# EAGLE board led-er-v2.2 (EAGLE 7.2.0)
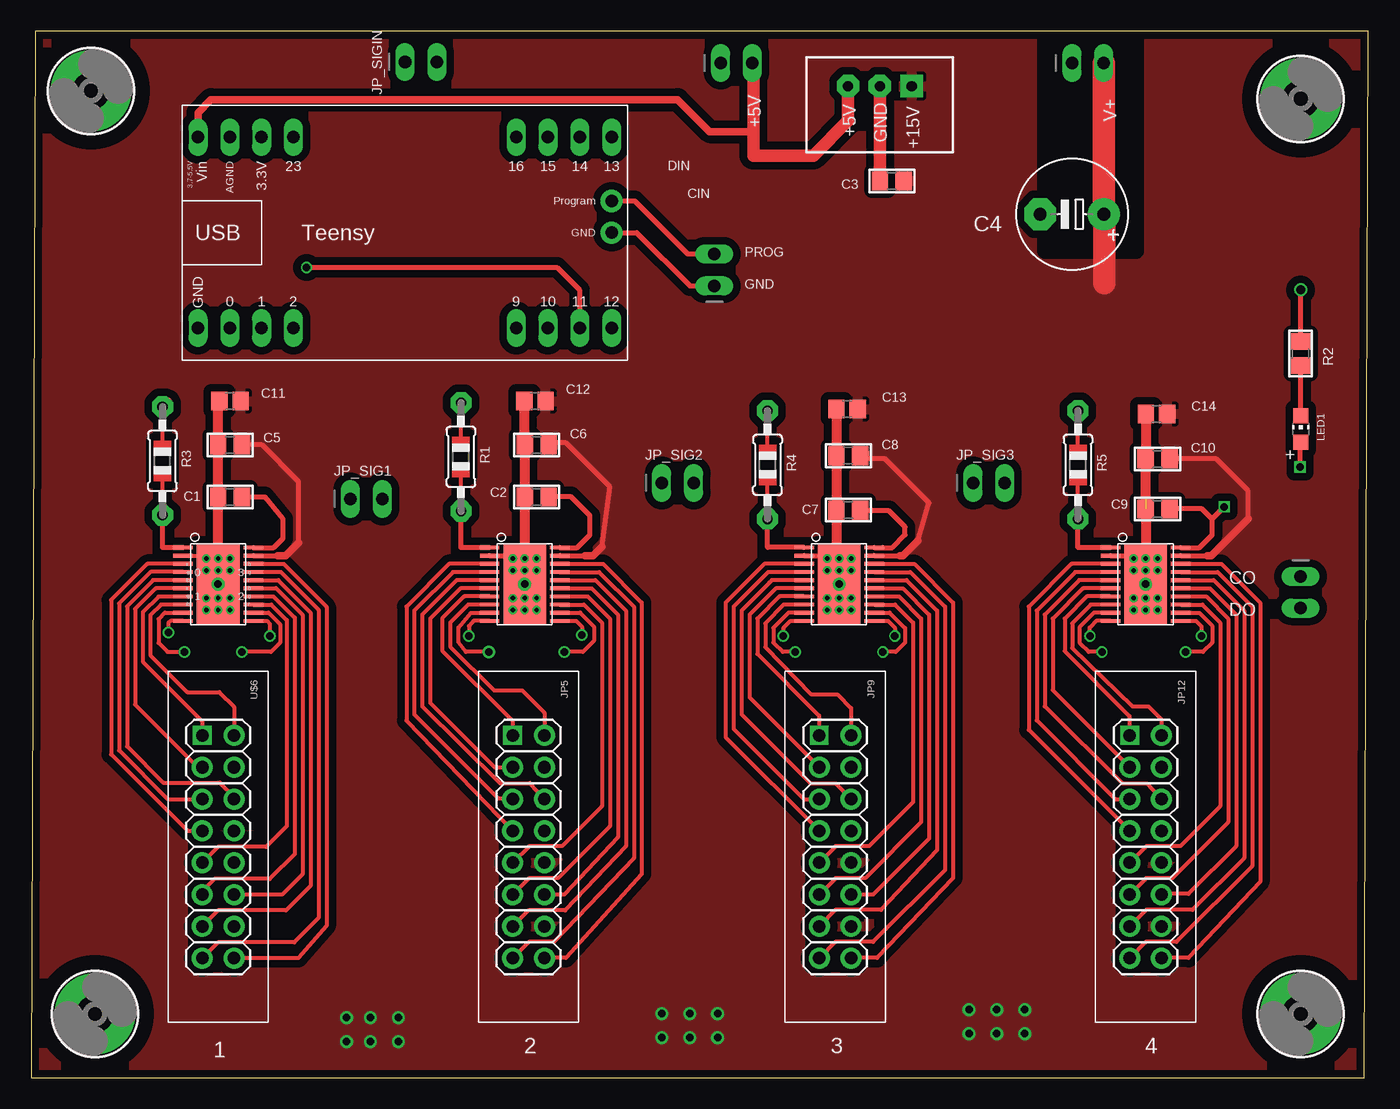
[diagram p0: board, top side]
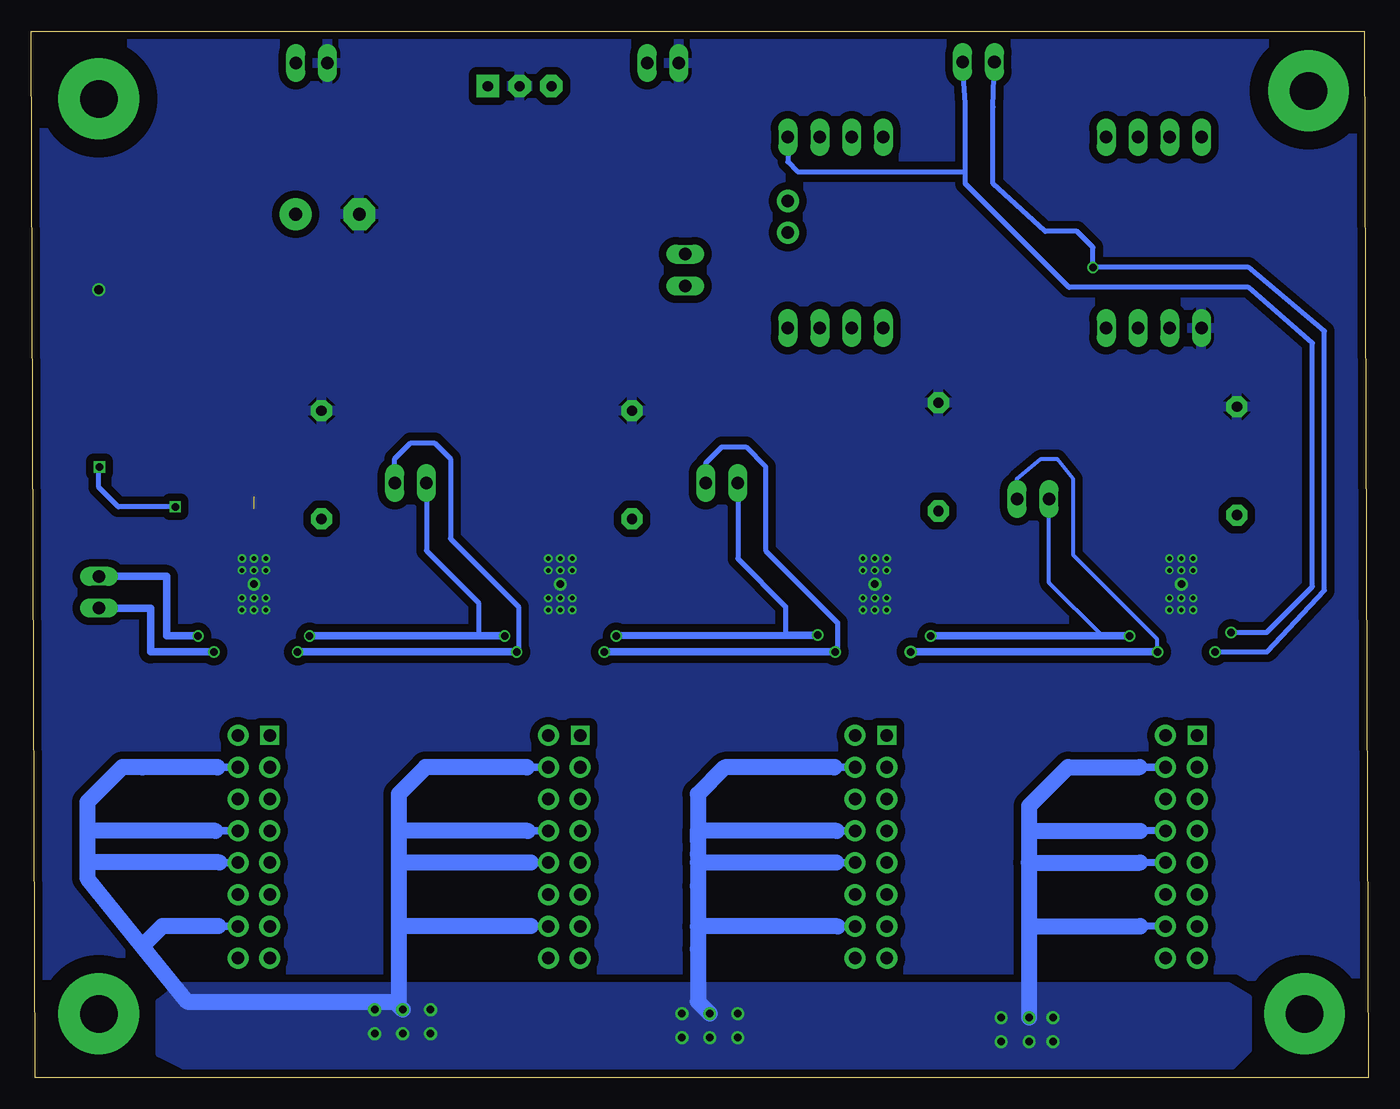
[diagram p1: board, bottom side, seen from below]

Size 106.72 x 83.49 mm. Coordinates in mm from the lower left corner, seen from the top.
Outline: 0,0 106.41,0 106.72,83.49 0.32,83.49 0,0
Copper layers (1*16): Top 0.035mm / dielectric 1.5mm / Bottom 0.035mm
Design rules "SeeedStudio_2layer_DRU_no_angle_20140221 *": minimum track width 6mil, minimum drill 12mil, track to track 6mil, track to pad 6mil, pad to pad 6mil, via to via 6mil, smd to smd 0mil, copper to edge 10mil, drill to drill 10mil, minimum pad ring 10mil, minimum via ring 6mil, stop-mask expansion 2mil, vias tented up to drill 100mil, thermal gap 10mil
tRestrict: area 13,36.6 to 13.6,37.7; area 10.5,25.4 to 19.4,33; area 35.3,25.4 to 44.1,33; area 60.4,25.4 to 68.6,33; area 84.5,25.4 to 93.4,33; area 14.9,20.3 to 20,25.4; area 14.9,10.8 to 21.9,19.1; area 11.7,32.4 to 17.5,36.2; area 7.6,25.2 to 11.8,32.5; area 36.3,33.1 to 43,36; area 60.8,32.5 to 67.8,36; area 85,32.5 to 92.7,36; 12 more areas

## Footprints (pad centres in the part's own frame; a part is rotated, then mirrored left to right if it is on the bottom)
0805 = smd 1.3 x 1.5: 1 -0.95,0; 2 0.95,0
E5-8,5 = drill 1.016 pad 2.54: + -2.54,0 | drill 1.016 pad 2.54 octagon: - 2.54,0
C0805 = smd 1.3 x 1.5: 1 -0.85,0; 2 0.85,0
HTSSOP20DAP = smd 0.3 x 1.55: 1 -2.925,-2.8; 2 -2.275,-2.8; 3 -1.625,-2.8; 4 -0.975,-2.8; 5 -0.325,-2.8; 6 0.325,-2.8; 7 0.975,-2.8; 8 1.625,-2.8; 9 2.275,-2.8; 10 2.925,-2.8; 11 2.925,2.8; 12 2.275,2.8; 13 1.625,2.8; 14 0.975,2.8; 15 0.325,2.8; 16 -0.325,2.8; 17 -0.975,2.8; 18 -1.625,2.8; 19 -2.275,2.8; 20 -2.925,2.8 | smd 6.5 x 3.4: EXP 0,0
2X08_RIBBON = drill 1 pad 1.676: P1 -8.89,1.27; P3 -6.35,1.27; P4 -6.35,-1.27; P5 -3.81,1.27; P6 -3.81,-1.27; P7 -1.27,1.27; P8 -1.27,-1.27; P9 1.27,1.27; P10 1.27,-1.27; P11 3.81,1.27; P12 3.81,-1.27; P13 6.35,1.27; P14 6.35,-1.27; P15 8.89,1.27; P16 8.89,-1.27 | drill 1 square: P2 -8.89,-1.27
1X02_OVAL = drill 1 long: 1 -1.27,0; 2 1.27,0
CHIP-LED0805 = smd 1.2 x 1.2: A 0,-1.05; C 0,1.05
0805-THM-7 = drill 0.813 pad 1.676 octagon: 1 -4.318,0; 2 4.318,0
TSR-1 = drill 0.8 pad 1.8 square: 1 -2.54,-1.5 | drill 0.8 pad 1.8 octagon: 2 0,-1.5; 3 2.54,-1.5
MOUNTINGHOLE_3.0_PLATED = drill 3 pad 6.452: P$1 0,0
TEENSY_LEDER = drill 1 pad 1.422 long: 0 12.7,7.62; 1 10.16,7.62; 2 7.62,7.62; 3.3V 10.16,-7.62; 9 -10.16,7.62; 10 -12.7,7.62; 11 -15.24,7.62; 12 -17.78,7.62; 13 -17.78,-7.62; 14 -15.24,-7.62; 15 -12.7,-7.62; 16 -10.16,-7.62; 23 7.62,-7.62; AGND 12.7,-7.62; GND 15.24,7.62; VIN 15.24,-7.62 | drill 1 pad 1.778: GND2 -17.78,0; PROG -17.78,-2.54

## Placement (x,y rotation side)
C1  10uF/16V  [0805]  15.87,46.33 180 top
C2  10uF/16V  [0805]  40.34,46.33 180 top
C3  10uF/16V  [0805]  68.69,71.55 180 top
C4  220uF+  [E5-8,5]  83.08,68.89 180 top
C5  1uF/50V  [0805]  15.87,50.5 180 top
C6  1uF/50V  [0805]  40.34,50.5 180 top
C7  10uF/16V  [0805]  65.23,45.28 180 top
C8  1uF/50V  [0805]  65.22,49.62 180 top
C9  10uF/16V  [0805]  89.91,45.38 180 top
C10  1uF/50V  [0805]  89.91,49.38 180 top
C11  10uF/25V  [C0805]  15.87,53.99 0 top
C12  10uF/25V  [C0805]  40.21,53.99 0 top
C13  10uF/25V  [C0805]  65.12,53.35 0 top
C14  10uF/25V  [C0805]  89.82,52.96 0 top
IC1  TLC59711  [HTSSOP20DAP]  14.92,39.37 270 top
IC2  TLC59711  [HTSSOP20DAP]  39.38,39.37 270 top
IC3  TLC59711  [HTSSOP20DAP]  64.49,39.37 270 top
IC4  TLC59711  [HTSSOP20DAP]  88.96,39.37 270 top
JP5  HEADER-2X8-RIBBON  [2X08_RIBBON]  39.7,18.41 270 top
JP9  HEADER-2X8-RIBBON  [2X08_RIBBON]  64.17,18.41 270 top
JP12  HEADER-2X8-RIBBON  [2X08_RIBBON]  88.96,18.41 270 top
JP_5V  [1X02_OVAL]  56.29,80.96 0 top
JP_15VIN  [1X02_OVAL]  84.35,80.96 0 top
JP_PROG  [1X02_OVAL]  54.53,64.45 90 top
JP_SIG1  [1X02_OVAL]  26.76,46.18 0 top
JP_SIG2  [1X02_OVAL]  51.6,47.46 0 top
JP_SIG3  [1X02_OVAL]  76.44,47.46 0 top
JP_SIGIN  [1X02_OVAL]  31.11,81.06 0 top
JP_SIGOUT  [1X02_OVAL]  101.33,38.73 270 top
LED1  Green  [CHIP-LED0805]  101.34,51.75 0 top
R1  22K  [0805-THM-7]  34.3,49.53 90 top
R2  470  [0805]  101.34,57.78 270 top
R3  22K  [0805-THM-7]  10.47,49.21 90 top
R4  22K  [0805-THM-7]  58.77,48.89 90 top
R5  22K  [0805-THM-7]  83.56,48.89 90 top
TSR1-2450  TSR1-2450  [TSR-1]  67.74,77.63 180 top
U$1  MOUNTINGHOLE  [MOUNTINGHOLE_3.0_PLATED]  101.34,78.11 0 top
U$2  MOUNTINGHOLE  [MOUNTINGHOLE_3.0_PLATED]  5.08,5.08 0 top
U$3  MOUNTINGHOLE  [MOUNTINGHOLE_3.0_PLATED]  101.34,5.08 0 top
U$4  MOUNTINGHOLE  [MOUNTINGHOLE_3.0_PLATED]  4.76,78.74 0 top
U$5  TEENSY_LEDER  [TEENSY_LEDER]  28.54,67.42 180 top
U$6  HEADER-2X8-RIBBON  [2X08_RIBBON]  14.92,18.41 270 top

## Library data of the parts
C1-C3 C5-C10 JP_5V JP_15VIN JP_PROG JP_SIG1-JP_SIG3 JP_SIGIN JP_SIGOUT R2 U$1-U$4 = microbuilder
C4 C11-C14 IC1-IC4 LED1 R1 R3-R5 = adafruit
JP5 JP9 JP12 U$5 U$6 = Andrews
TSR1-2450 = SteelCaveRobotics-Power

## Nets
+15V: C3.1 C4.+ C5.1 C6.1 C8.1 C10.1 C11.2 C12.2 C13.2 C14.2 IC1.19 IC2.19 IC3.19 IC4.19 JP5.P3 JP5.P7 JP5.P9 JP5.P13 JP9.P3 JP9.P7 JP9.P9 JP9.P13 JP12.P3 JP12.P7 JP12.P9 JP12.P13 JP_15VIN.2 TSR1-2450.1 U$6.P3 U$6.P7 U$6.P9 U$6.P13
GND: C1.2 C2.2 C3.2 C4.- C5.2 C6.2 C7.2 C8.2 C9.2 C10.2 C11.1 C12.1 C13.1 C14.1 IC1.2 IC1.EXP IC2.2 IC2.EXP IC3.2 IC3.EXP IC4.2 IC4.EXP JP_5V.1 JP_15VIN.1 R1.2 R2.1 R3.2 R4.2 R5.2 TSR1-2450.2 U$5.GND
JP1: JP_5V.2 TSR1-2450.3 U$5.VIN
N$1: LED1.C R2.2
N$2: IC1.1 R3.1
N$3: IC1.4 U$6.P6
N$4: IC1.3 U$6.P8
N$5: IC1.14 U$6.P12
N$6: IC1.13 U$6.P10
N$7: IC2.7 JP5.P2
N$8: IC2.6 JP5.P4
N$9: IC2.5 JP5.P5
N$10: IC2.4 JP5.P6
N$11: IC1.15 U$6.P11
N$12: IC1.16 U$6.P14
N$13: IC1.17 U$6.P16
N$14: IC1.18 U$6.P15
N$15: IC2.1 R1.1
N$16: IC3.8 JP9.P1
N$17: IC2.13 JP5.P10
N$18: IC3.4 JP9.P6
N$19: IC4.7 JP12.P2
N$20: IC3.7 JP9.P2
N$21: IC4.6 JP12.P4
N$22: IC3.6 JP9.P4
N$23: IC2.14 JP5.P12
N$24: IC2.15 JP5.P11
N$25: IC2.16 JP5.P14
N$26: IC2.17 JP5.P16
N$27: IC2.18 JP5.P15
N$28: IC3.1 R4.1
N$29: IC3.14 JP9.P12
N$30: IC2.8 JP5.P1
N$31: IC3.13 JP9.P10
N$37: IC3.15 JP9.P11
N$38: IC3.16 JP9.P14
N$39: IC3.17 JP9.P16
N$40: IC3.18 JP9.P15
N$41: IC4.1 R5.1
N$42: IC2.3 JP5.P8
N$43: IC4.13 JP12.P10
N$44: IC3.5 JP9.P5
N$45: IC1.6 U$6.P4
N$46: IC1.5 U$6.P5
N$47: IC1.7 U$6.P2
N$48: IC1.8 U$6.P1
N$49: IC4.14 JP12.P12
N$50: IC4.15 JP12.P11
N$51: IC4.16 JP12.P14
N$52: IC4.17 JP12.P16
N$53: IC4.18 JP12.P15
N$54: JP_PROG.1 U$5.GND2
N$55: JP_PROG.2 U$5.PROG
N$56: C1.1 IC1.20
N$57: C7.1 IC3.20
N$58: C2.1 IC2.20
N$59: IC4.11 JP_SIGOUT.1
N$60: IC4.12 JP_SIGOUT.2
N$61: IC3.3 JP9.P8
N$62: IC4.3 JP12.P8
N$71: IC4.4 JP12.P6
N$79: IC4.5 JP12.P5
N$80: IC4.8 JP12.P1
SCKI: IC1.10 JP_SIGIN.2 U$5.13
SCKO1: IC1.11 IC2.10 JP_SIG1.1
SCKO2: IC2.11 IC3.10 JP_SIG2.1
SCKO3: IC3.11 IC4.10 JP_SIG3.1
SDTI: IC1.9 JP_SIGIN.1 U$5.11
SDTO1: IC1.12 IC2.9 JP_SIG1.2
SDTO2: IC2.12 IC3.9 JP_SIG2.2
SDTO3: IC3.12 IC4.9 JP_SIG3.2
VCC: C9.1 IC4.20 LED1.A

## Tracks (layer width: path | path; a pad name or v marks a point on that pad's centre or on a via)
+15V  (via drill 0.6 pad 1.02)
  Top 0.406: IC1.19 19.67,41.65 | 21.34,42.68 21.34,47.56 18.41,50.49 C5.1 | IC2.19 44.19,41.65 | 45.55,42.36 46.19,47.14 42.68,50.64 41.43,50.64 C6.1 | IC3.19 69.36,41.65 | 70.73,42.67 70.78,42.85 71.67,45.87 68.16,49.37 66.23,49.37 C8.1 | IC4.19 93.88,41.65 | 97.15,44.59 97.15,46.82 94.6,49.37 C10.1
  Top 0.61: 19.67,41.65 20.3,41.65 21.34,42.68 | 44.19,41.65 44.83,41.65 45.55,42.36 | 69.36,41.65 69.58,41.65 70.78,42.85 | 93.88,41.65 94.2,41.65 97.15,44.59
  Top 1.27: C4.+ 85.68,68.89
  Top 1.778: JP_15VIN.2 C4.+ | 85.68,68.89 85.68,63.38
  Bottom 0.61: 18.2,12.08 16.22,12.1 U$6.P13 | 18.21,17.16 16.24,17.2 U$6.P9 | 18.19,19.69 16.25,19.75 U$6.P7 | 18.25,24.77 16.17,24.75 U$6.P3 | JP5.P3 42.6,24.77 | JP5.P7 42.43,19.68 42.44,19.69 | JP5.P9 42.47,17.14 42.49,17.16 | JP5.P13 42.35,12.06 42.35,12.07 | JP9.P3 67.17,24.77 | JP9.P7 67.1,19.68 | 77.33,19.68 77.4,19.75 | JP9.P9 66.86,17.14 | 77.34,17.14 77.4,17.2 | JP9.P13 66.81,12.06 66.83,12.09 | 77.38,12.09 77.4,12.1 | JP12.P7 92.01,19.68 92.02,19.7 | 102.19,19.7 102.24,19.75 | JP12.P9 91.69,17.14 91.71,17.17 | 102.21,17.17 102.24,17.2 | JP12.P13 91.76,12.06 91.78,12.08 | JP12.P3 91.87,24.77
  Bottom 1.27: 27.07,18.16 27.07,21.66 23.97,24.77 18.23,24.77 18.25,24.77 | 27.07,18.16 27.07,15.29 | 27.07,15.29 27.07,10.83 | 27.07,10.83 v27.07,4.78 | 27.07,18.16 27.08,19.68 18.22,19.68 18.19,19.69 | 27.07,15.29 27.11,17.14 18.21,17.14 18.21,17.16 | 27.07,10.83 27.08,12.06 18.19,12.06 18.2,12.08 | 42.6,24.77 42.61,24.75 51.37,24.75 53.51,22.61 53.51,17.84 | 53.51,17.84 53.51,15.29 | 53.51,15.29 53.51,10.27 | 53.51,10.27 53.51,6.05 v52.55,5.1 | 42.44,19.69 53.52,19.69 53.51,17.84 | 42.49,17.16 53.51,17.16 53.51,15.29 | 42.35,12.07 53.52,12.07 53.51,10.27 | 67.17,24.77 67.18,24.76 75.24,24.76 75.25,24.77 77.4,22.61 77.4,19.75 77.4,17.2 77.4,12.1 77.4,5.73 v77.08,5.42 77.72,6.05 94.28,6.05 97.86,10.48 | 67.1,19.68 77.33,19.68 | 66.86,17.14 77.34,17.14 | 66.83,12.09 77.38,12.09 | 97.86,10.48 102.24,15.93 102.24,17.2 102.24,19.75 102.24,21.98 99.46,24.77 97.86,24.76 91.87,24.76 91.87,24.77 | 92.02,19.7 102.19,19.7 | 91.71,17.17 102.21,17.17 | 91.78,12.08 96.27,12.08 97.86,10.48
  other vias: 25.16,4.78 25.16,2.87 27.07,2.87 50.33,5.1 50.33,3.19 52.56,3.19 74.85,5.41 74.85,3.5 77.08,3.5 29.3,2.87 29.3,4.78 54.78,5.1 54.78,3.19 79.31,3.5 79.31,5.41
  pour Top (isolate 0.61, rank 2): 0.32,83.19 0,0 106.42,0.32 106.74,83.5
  pour Bottom: 9.56,6.37 11.15,7.33 94.92,7.33 96.51,6.05 96.51,1.91 94.6,0.96 10.83,0.96 9.56,2.23
GND  (via drill 0.36, 0.6 pad 1.02, 0.7)  (1 unrouted)
  Top 0.305: 38.06,41.65 v38.43,41.43 | IC1.2 13.96,41.65 v13.96,41.43
  Top 0.406: IC2.2 38.06,41.65 | R2.1 v101.34,62.87 | IC3.2 63.54,41.65 v63.54,41.43 | IC4.2 88.01,41.65 v88.01,41.43 | v39.39,41.44 v39.38,41.43
  Top 0.61: 14.91,46.01 C1.2 | 14.92,53.89 C11.1 | 10.93,53.99 R3.2 | 34.44,53.99 R1.2 | 39.33,50.6 C6.2
  Top 0.813: v14.91,41.43 14.91,46.01 | C1.2 C5.2 14.92,53.89 | C12.1 39.33,50.6 | C6.2 C2.2 v39.39,41.44 | C13.1 64.27,49.31 C8.2 C7.2 64.28,41.64 v64.49,41.43 | 88.96,46.35 v88.96,41.43 | C9.2 C10.2 88.97,49.39 C14.1
  Top 1.016: TSR1-2450.2 C3.2
  Top 1.27: 10.47,53.66 R3.2 | 58.77,53.34 R4.2 | 83.56,53.34 R5.2
  other vias: 88.96,39.37 89.91,37.31 88.96,37.31 88.01,37.31 89.91,38.26 88.96,38.26 88.01,38.26 89.91,40.48 88.96,40.48 88.01,40.48 64.49,39.37 65.44,38.26 64.49,38.26 63.54,38.26 65.44,37.31 64.49,37.31 63.54,37.31 65.44,40.48 64.49,40.48 63.54,40.48 39.38,39.37 38.43,38.26 39.38,38.26 40.34,38.26 40.34,40.48 39.38,40.48 38.43,40.48 38.43,37.31 39.38,37.31 40.34,37.31 14.92,39.37 15.87,40.48 14.92,40.48 13.96,40.48 15.87,41.43 15.87,38.26 14.92,38.26 13.96,38.26 13.96,37.31 14.92,37.31 15.87,37.31 40.34,41.43 65.44,41.43 89.91,41.43
  pour Bottom (isolate 0.61, rank 2): 0,83.19 0,0 106.42,0.32 106.42,83.5
JP1
  Top 0.61: U$5.VIN 13.3,77 14.33,78.04 51.6,78.04 54.15,75.49 57.65,75.49
  Top 1.016: JP_5V.2 57.65,80.87 57.65,75.49 57.65,73.58 62.43,73.58 65.2,76.35 TSR1-2450.3
N$1
  Top 0.406: LED1.C R2.2
N$2
  Top 0.406: IC1.1 10.47,42.3 R3.1
N$3
  Top 0.305: IC1.4 9.52,40.35 7.01,37.83 7.01,26.12 10.9,22.23 U$6.P6
N$4
  Top 0.305: IC1.3 9.25,41 6.37,38.11 6.37,25.8 12.48,19.68 U$6.P8
N$5
  Top 0.305: IC1.14 19.32,38.4 21.02,36.7 21.02,17.84 19.04,15.86 14.62,15.86 13.64,14.88 U$6.P12
N$6
  Top 0.305: U$6.P10 14.91,18.41 18.73,18.41 20.39,20.07 20.39,36.51 19.15,37.75 IC1.13
N$7
  Top 0.305: IC2.7 34.55,38.39 32.81,36.65 32.81,34.08 38.43,28.46 JP5.P2
N$8
  Top 0.305: IC2.6 34.27,39.05 31.85,36.63 31.85,29.9 36.99,24.76 JP5.P4
N$9
  Top 0.305: IC2.5 33.96,39.7 31.21,36.95 31.21,29.62 37.43,23.51 39.79,23.51 JP5.P5
N$10
  Top 0.305: IC2.4 33.66,40.34 30.58,37.27 30.58,28.98 37.27,22.3 38.36,22.3 JP5.P6
N$11
  Top 0.305: IC1.15 19.53,39.05 21.66,36.92 21.66,16.24 20.02,14.61 U$6.P11
N$12
  Top 0.305: U$6.P14 14.91,13.34 20.34,13.34 22.3,15.29 22.3,37.11 19.71,39.69 IC1.16
N$13
  Top 0.305: U$6.P16 14.91,10.79 20.99,10.79 22.93,12.74 22.93,37.33 19.91,40.35 IC1.17
N$14
  Top 0.305: IC1.18 20.15,40.99 23.57,37.57 23.57,12.1 21.31,9.53 U$6.P15
N$15
  Top 0.406: IC2.1 34.3,42.3 R1.1
N$16
  Top 0.305: IC3.8 60.05,37.74 58.6,36.25 58.6,34.35 62.23,30.59 64.34,30.58 65.44,29.48 JP9.P1
N$17
  Top 0.305: IC2.13 44.11,37.74 45.55,36.31 45.55,21.66 42.36,18.47 39.76,18.47 JP5.P10
N$18
  Top 0.305: IC3.4 58.82,40.34 56.06,37.59 56.06,27.83 61.68,22.21 62.89,22.21 JP9.P6
N$19
  Top 0.305: IC4.7 84.26,38.4 82.5,36.63 82.5,34.03 87.67,28.85 87.67,27.32 JP12.P2
N$20
  Top 0.305: IC3.7 59.74,38.4 57.97,36.63 57.97,33.8 62.9,28.88 JP9.P2
N$21
  Top 0.305: IC4.6 83.96,39.05 81.54,36.63 81.54,30.91 JP12.P4
N$22
  Top 0.305: IC3.6 59.43,39.05 57.33,36.95 57.33,30.33 JP9.P4
N$23
  Top 0.305: IC2.14 44.42,38.4 46.19,36.63 46.19,20.07 42.04,15.93 39.75,15.93 JP5.P12
N$24
  Top 0.305: IC2.15 44.73,39.05 46.82,36.95 46.82,19.19 42.55,14.6 JP5.P11
N$25
  Top 0.305: IC2.16 45.03,39.7 47.46,37.27 47.46,18.47 42.63,13.34 39.69,13.34 JP5.P14
N$26
  Top 0.305: IC2.17 45.34,40.34 48.1,37.59 48.1,17.52 41.73,10.83 39.73,10.83 JP5.P16
N$27
  Top 0.305: IC2.18 45.64,40.99 48.73,37.9 48.73,16.24 42.68,9.55 41,9.55 JP5.P15
N$28
  Top 0.305: IC3.1 61.67,42.31
  Top 0.406: 61.67,42.31 58.77,42.31 R4.1
N$29
  Top 0.305: IC3.14 69.26,38.4 71.03,36.63 71.03,20.39 66.57,15.93 64.22,15.93 JP9.P12
N$30
  Top 0.305: IC2.8 34.87,37.74 33.44,36.31 33.44,34.4 36.95,30.9 39.18,30.9 40.97,29.1 JP5.P1
N$31
  Top 0.305: IC3.13 68.96,37.74 70.39,36.31 70.39,21.98 66.89,18.47 64.23,18.47 JP9.P10
N$37
  Top 0.305: IC3.15 69.57,39.05 71.67,36.95 71.67,19.06 67.21,14.6 JP9.P11
N$38
  Top 0.305: IC3.16 69.88,39.7 72.3,37.27 72.3,18.16 67.84,13.38 64.21,13.38 JP9.P14
N$39
  Top 0.305: IC3.17 70.18,40.34 72.94,37.59 72.94,16.56 67.21,10.83 64.21,10.83 JP9.P16
N$40
  Top 0.305: IC3.18 70.49,40.99 73.58,37.9 73.58,15.93 67.53,9.55 65.47,9.55 JP9.P15
N$41
  Top 0.406: IC4.1 83.56,42.3 R5.1
N$42
  Top 0.305: IC2.3 33.35,40.99 29.94,37.59 29.94,28.49 JP5.P8
N$43
  Top 0.305: IC4.13 93.48,37.74 94.92,36.31 94.92,21.66 91.73,18.47 89.02,18.47 JP12.P10
N$44
  Top 0.305: IC3.5 59.12,39.7 58.92,39.5 | 58.92,39.5 | 58.92,39.5 56.7,37.27 56.7,28.98 62.22,23.48 64.2,23.48 JP9.P5
N$45
  Top 0.305: IC1.6 9.94,39.05 8.28,37.4 8.28,29.77 13.29,24.77 U$6.P4
N$46
  Top 0.305: IC1.5 9.72,39.69 7.64,37.61 7.64,26.44 10.54,23.55 15.05,23.55 16.18,22.41 U$6.P5
N$47
  Top 0.305: IC1.7 10.16,38.39 8.91,37.14 8.91,33.18 13.64,28.45 U$6.P2
N$48
  Top 0.305: IC1.8 10.36,37.75 9.51,36.9 9.51,33.71 12.46,30.76 15.01,30.76 16.18,29.58 U$6.P1
N$49
  Top 0.305: IC4.14 93.79,38.4 95.56,36.63 95.56,20.39 91.1,15.93 89.01,15.93 JP12.P12
N$50
  Top 0.305: IC4.15 94.09,39.05 96.19,36.95 96.19,18.47 92.37,14.65 90.28,14.65 JP12.P11
N$51
  Top 0.305: IC4.16 94.4,39.7 96.83,37.27 96.83,17.52 92.69,13.38 89,13.38 JP12.P14
N$52
  Top 0.305: IC4.17 94.71,40.34 97.47,37.59 97.47,16.88 91.41,10.83 88.99,10.83 JP12.P16
N$53
  Top 0.305: IC4.18 95.01,40.99 98.1,37.9 98.1,15.61 92.37,9.55 90.26,9.55 JP12.P15
N$54
  Top 0.406: U$5.GND2 48.33,67.42 52.57,63.19 JP_PROG.1
N$55
  Top 0.406: U$5.PROG 48.17,69.96 52.39,65.74 54.51,65.74 JP_PROG.2
N$56
  Top 0.406: C1.1 18.65,46.33 20.07,44.59 20.07,43 19.36,42.3 IC1.20
N$57
  Top 0.406: 67.98,42.3 IC3.20 68.73,42.3 69.75,43.32 69.75,43.95 68.48,45.23 66.23,45.23 C7.1
N$58
  Top 0.406: IC2.20 43.57,42.3 44.59,43.32 44.59,44.84 43.09,46.34 41.3,46.34 C2.1
N$59  (via drill 0.6)
  Top 0.305: IC4.11 | IC4.11 92.97,36.45 93.41,36 v93.41,35.24
  Bottom 0.61: v93.41,35.24 95.93,35.24 95.93,40.01 JP_SIGOUT.1
N$60  (via drill 0.6)
  Top 0.305: IC4.12 93.25,37.09 94.28,36.06 94.28,34.72 93.53,33.97 v92.14,33.97
  Bottom 0.61: v92.14,33.97 97.2,33.97 97.2,37.47 JP_SIGOUT.2
N$61
  Top 0.305: IC3.3 58.51,40.99 55.42,37.9 55.42,27.16 JP9.P8
N$62
  Top 0.305: IC4.3 83.04,40.99 79.63,37.59 79.63,27.75 JP12.P8
N$71
  Top 0.305: IC4.4 83.34,40.34 80.27,37.27 80.27,28.5 86.56,22.21 87.67,22.21 JP12.P6
N$79
  Top 0.305: IC4.5 83.65,39.7 80.9,36.95 80.9,29.62 87.11,23.48 89.04,23.48 JP12.P5
N$80
  Top 0.305: IC4.8 84.57,37.74 83.09,36.25 83.11,34.27 87.91,29.62 89.18,29.62 90.23,28.58 JP12.P1
SCKI  (via drill 0.6)
  Top 0.305: IC1.10 11.11,36.45 10.95,36.28 v10.95,35.54 v10.94,35.53
  Bottom 0.406: v10.94,35.53 8.11,35.53 4.46,39.18 4.46,58.61 9.55,63.07 23.89,63.07 32.17,71.35 32.17,72.3 | 32.17,72.3 32.17,77.77 JP_SIGIN.2 | U$5.13 46.32,73.08 45.55,72.3 32.17,72.3
SCKO1  (via drill 0.6)
  Top 0.305: IC1.11 18.81,36.44 19.04,36.21 v19.04,35.24 | IC2.10 36.54,36.45 35.31,36.45 34.93,36.02 v34.93,35.24 | v34.93,35.24
  Bottom 0.305: v19.04,35.24 21.23,35.24 25.48,39.5 JP_SIG1.1
  Bottom 0.61: v19.04,35.24 v34.93,35.24
SCKO2  (via drill 0.6)
  Top 0.305: v60.04,35.24 60.05,35.88 60.61,36.45 IC3.10 | IC2.11 43.5,36.45 43.95,35.99 43.95,35.38 v43.96,35.31
  Bottom 0.406: JP_SIG2.1 50.33,41.41 46.5,37.59 46.5,35.3
  Bottom 0.61: v43.96,35.31 46.5,35.3 v60.04,35.24
SCKO3  (via drill 0.6)
  Top 0.305: IC3.11 67.35,36.45 68.4,36.45 68.94,35.91 v68.94,35.24 | v84.51,35.24 84.49,35.89 84.49,35.91 85.02,36.44 IC4.10
  Bottom 0.406: JP_SIG3.1 75.17,42.05 71.03,37.9 71.03,35.24
  Bottom 0.61: v68.94,35.24 71.03,35.24 v84.51,35.24
SDTI  (via drill 0.6)
  Top 0.305: v12.22,33.97 10.87,33.97 10.15,34.69 10.15,36.59 10.66,37.09 IC1.9
  Top 0.406: v21.98,64.66 41.95,64.66 43.76,62.85 43.76,59.82 U$5.11
  Bottom 0.406: v12.22,33.97 8.07,33.97 3.5,38.86 3.5,59.56 9.55,64.66 v21.98,64.66 21.98,66.25 23.25,67.53 25.8,67.53 29.94,71.35 29.94,77.45 JP_SIGIN.1
SDTO1  (via drill 0.6, 0.6 pad 1.02)
  Top 0.305: IC1.12 18.95,37.1 19.85,36.19 19.85,34.68 19.14,33.97 v16.82,33.97 | v36.52,33.97 34.7,33.97 34.1,34.74 34.1,35.91 35.11,37.09 IC2.9
  Bottom 0.305: JP_SIG1.2 28.02,47.78 26.12,49.37 24.84,49.37 23.57,47.78 23.57,41.73 16.88,35.04 16.88,34.03 v16.82,33.97
  Bottom 0.61: v16.82,33.97 v36.52,33.97
SDTO2  (via drill 0.6)
  Top 0.305: v61,33.97 59.99,33.97 59.24,34.72 59.24,35.88 60.45,37.1 IC3.9 | IC2.12 43.81,37.09 44.91,35.99 44.91,34.85 44.03,33.96 v42.57,33.96 v42.56,33.97
  Bottom 0.406: JP_SIG2.2 52.87,49.06 51.6,50.33 49.69,50.33 48.1,48.73 48.1,42.04 42.36,36.31 42.36,34.17 v42.56,33.97
  Bottom 0.61: v42.56,33.97 v61,33.97
SDTO3  (via drill 0.6)
  Top 0.305: v85.47,33.97 84.41,33.97 83.67,34.7 83.67,35.93 84.84,37.09 IC4.9 | IC3.12 67.3,37.11 68.52,37.11 69.75,35.87 69.75,34.72 69.01,33.97 v67.98,33.97
  Bottom 0.406: JP_SIG3.2 77.71,49.37 76.44,50.64 74.53,50.64 73.26,49.37 73.26,43 67.84,37.59 67.84,34.11 v67.98,33.97
  Bottom 0.61: v67.98,33.97 v85.47,33.97
VCC  (via drill 0.6)
  Top 0.406: IC4.20 93.26,42.3 94.28,43.32 94.28,44.56 | 94.28,44.56 93.46,45.38 C9.1 | 94.28,44.56 94.28,44.59 v95.24,45.55 | v101.29,48.73 101.29,50.65 LED1.A
  Bottom 0.406: v95.24,45.55 99.78,45.55 101.34,47.11 101.34,48.68 v101.29,48.73

## Text on the board
tPlace: DOUT | CLK | +5V | V+ | +5V | GND | +15V | DIN | CIN | PROG | GND | r | b | b | g | 3 | g | r | r | b | CO | b | g | 2 | g | r | DO | 1 | 2 | 3 | 4
tNames: 0 | 1